# Altium PCB Hospital Negatoscope Touch PCB v2 .PcbDoc
Units mm, origin at the board's own origin, x right, y up, seen from the top; angles counter-clockwise.
Board outline 140.35 x 32.79 mm, 2 copper layers (Top Layer, Bottom Layer); 31 components, 41 nets, 93 pads, 20 vias.
Unrouted connection lines stored in the file: 104.
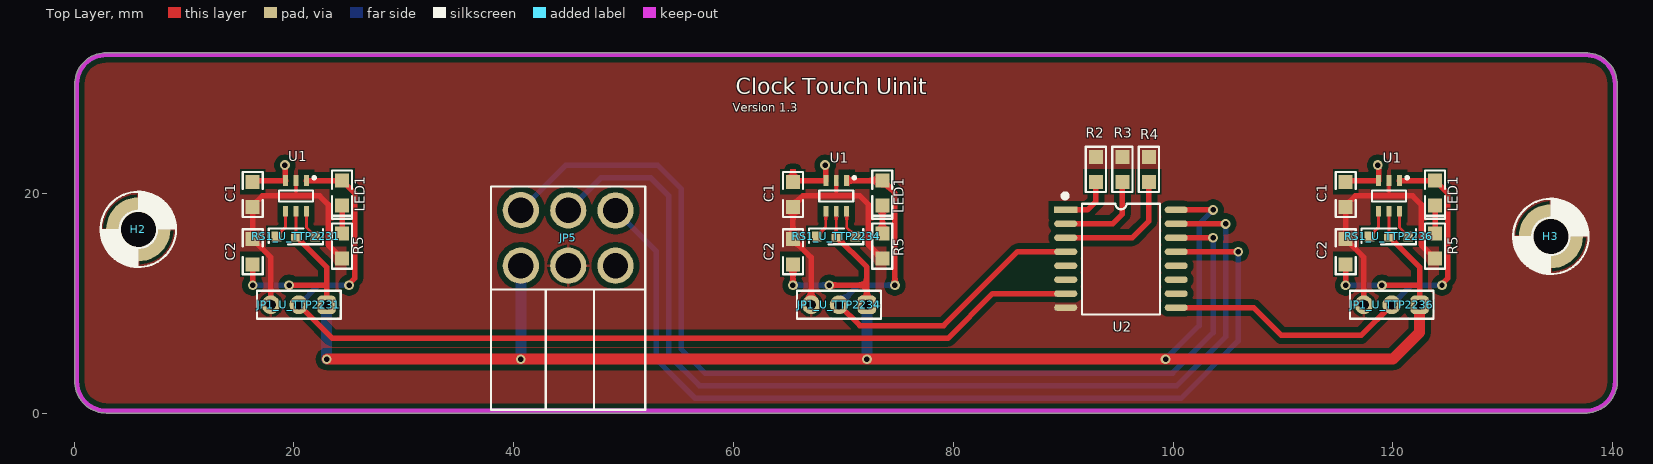
[diagram p0: Top Layer view]
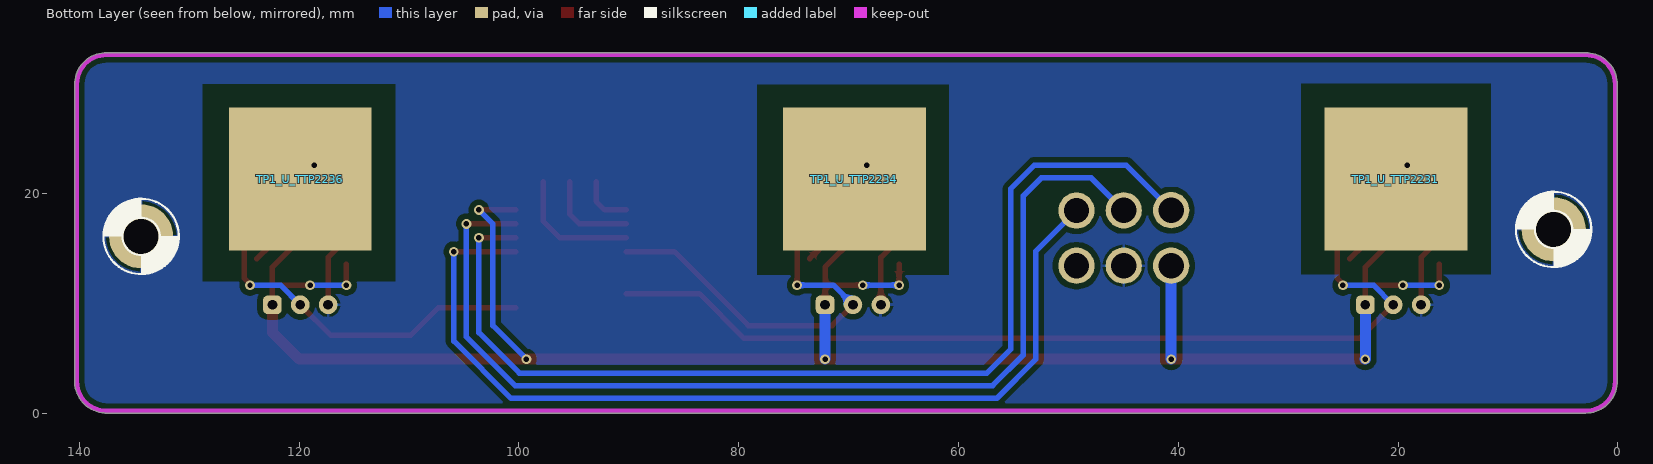
[diagram p1: Bottom Layer view, seen from below]

## Layer stack, top to bottom
Top Solder: solder mask 0.0102, Solder Resist, Dk 3.5
Top Layer: signal copper 0.0356
Dielectric 1: dielectric 0.32, FR-4, Dk 4.8
Bottom Layer: signal copper 0.0356
Bottom Solder: solder mask 0.0102, Solder Resist, Dk 3.5

## Board outline
0.054,2.794 0.054,30.099 0.059,30.144 cw(c2.921,29.972) 2.749,32.834 2.794,32.839 2.923,32.839 126.873,32.839 137.668,32.839 137.713,32.834 cw(c137.541,29.972) 140.403,30.144 140.408,30.099 140.408,2.667 140.388,2.579 cw(c137.541,2.921) 137.713,0.059 137.668,0.054 137.539,0.054 2.924,0.054 2.921,0.054 cw(c2.921,2.921)

## Design rules (kind name [scope] priority, off if disabled: settings)
Clearance Clearance_3 [InNamedPolygon('GND_L01_P004') Or InNamedPolygon('GND_L02_P005')] p1: gap=0.5 ignorepadtopadclearanceinfootprint=FALSE
Clearance Clearance_2 [InNamedPolygon('NONET_L01_P002') Or InNamedPolygon('NONET_L02_P003')] p2: gap=0.5 ignorepadtopadclearanceinfootprint=FALSE
Clearance Clearance_1 [InNamedPolygon('GND_L01_P000') Or InNamedPolygon('NONET_L01_P001')] p3: gap=0.5 ignorepadtopadclearanceinfootprint=FALSE
Clearance [All] p4: gap=0.254 ignorepadtopadclearanceinfootprint=FALSE
ComponentClearance [All] p1: gap=0 collisioncheckmode=3 verticalgap=0 showdistances=FALSE
HoleSize [All] p1: absolutevalues=TRUE maxlimit=5 minlimit=0.025 maxpercent=80.000 minpercent=20.000
PolygonConnect PolygonConnect_3 [All vs IsNamedPolygon('GND_L01_P004') Or IsNamedPolygon('GND_L02_P005')] p1: thpad.connectstyle=Relief thpad.reliefconductorwidth=0.254 thpad.reliefentries=4 thpad.polygonreliefangle="90 Angle" thpad.airgapwidth=0.254 smdpad.connectstyle=Direct smdpad.reliefconductorwidth=0.254 smdpad.reliefentries=4 smdpad.polygonreliefangle="90 Angle" smdpad.airgapwidth=0.254 via.connectstyle=Direct via.reliefconductorwidth=0.254 via.reliefentries=4 via.polygonreliefangle="90 Angle" via.airgapwidth=0.254
PolygonConnect PolygonConnect_2 [All vs IsNamedPolygon('NONET_L01_P002') Or IsNamedPolygon('NONET_L02_P003')] p2: thpad.connectstyle=Relief thpad.reliefconductorwidth=0.254 thpad.reliefentries=4 thpad.polygonreliefangle="90 Angle" thpad.airgapwidth=0.254 smdpad.connectstyle=Relief smdpad.reliefconductorwidth=0.254 smdpad.reliefentries=4 smdpad.polygonreliefangle="90 Angle" smdpad.airgapwidth=0.254 via.connectstyle=Direct via.reliefconductorwidth=0.254 via.reliefentries=4 via.polygonreliefangle="90 Angle" via.airgapwidth=0.254
PolygonConnect PolygonConnect_1 [All vs IsNamedPolygon('GND_L01_P000') Or IsNamedPolygon('NONET_L01_P001')] p3: connectstyle=Direct reliefconductorwidth=0.254 reliefentries=4 polygonreliefangle="90 Angle" airgapwidth=0.254
PolygonConnect [All] p4: connectstyle=Relief reliefconductorwidth=0.254 reliefentries=4 polygonreliefangle="90 Angle" airgapwidth=0.254
RoomDefinition U_TTP2234 [InComponentClass('U_TTP2234')] p1 off: confinementstyle=ConfineIn formatcopy=TRUE lockcomponents=FALSE outline 63.881,12.446 75.184,12.446 75.184,27.559 63.881,27.559
RoutingVias [All] p1: holewidth=0.5 width=0.9 viastyle="Through Hole" minholewidth=0.5 minwidth=0.9 maxholewidth=0.5 maxwidth=0.9
SolderMaskExpansion [All] p1: expansion=0.102 istentingtop=FALSE
Width [All] p1: maxlimit=1 minlimit=0.254 preferedwidth=0.5
28 further rules are at their usual default settings.

## Classes and differential pairs
channel class TTP223: U_TTP2231 U_TTP2232 U_TTP2233 U_TTP2234 U_TTP2235 U_TTP2236
component class U_TTP2236: C1 C2 JP1_U_TTP2236 LED1 R5 RS1_U_TTP2236 TP1_U_TTP2236 U1
component class U_TTP2234: C1 C2 JP1_U_TTP2234 LED1 R5 RS1_U_TTP2234 TP1_U_TTP2234 U1
component class U_TTP2231: C1 C2 JP1_U_TTP2231 LED1 R5 RS1_U_TTP2231 TP1_U_TTP2231 U1
component class U_PCF8574: R2 R3 R4 U2
component class Main: H2 H3

## Components (designator, comment, footprint, x,y, rotation, side; value= is the part's Value field where it differs from the comment)
C1 "100nF" "C 0805" 115.697,19.939 r270 top
C1 "100nF" "C 0805" 65.405,19.939 r270 top
C1 "100nF" "C 0805" 16.25,19.939 r270 top
C2 "30pF" "C 0805" 115.697,14.732 r90 top
C2 "30pF" "C 0805" 65.405,14.732 r90 top
C2 "30pF" "C 0805" 16.25,14.732 r90 top
H2 "Round Pad" P3.2C 5.842,16.764 r0 top
H3 "Round Pad" P3.2C 134.366,16.127 r0 top
JP1_U_TTP2231 "HDR-1X3" HDR-1X3_M 22.981,9.906 r180 top (schematic designator JP1)
JP1_U_TTP2234 "HDR-1X3" HDR-1X3_M 72.136,9.906 r180 top (schematic designator JP1)
JP1_U_TTP2236 "HDR-1X3" HDR-1X3_M 122.428,9.906 r180 top (schematic designator JP1)
JP5 "Header3X2" ATX-3*2-Right 37.943,0.267 r0 top
LED1 "LED-SMD" "LED 0805G" 123.825,20.066 r270 top
LED1 "LED-SMD" "LED 0805G" 73.533,20.066 r270 top
LED1 "LED-SMD" "LED 0805G" 24.378,20.066 r270 top
R2 "10K" "R 0805" 92.964,22.225 r270 top
R3 "10K" "R 0805" 95.377,22.225 r270 top
R4 "10K" "R 0805" 97.79,22.225 r270 top
R5 "Value" "R 0805" 123.825,15.24 r270 top (schematic designator R?)
R5 "Value" "R 0805" 73.533,15.24 r270 top (schematic designator R?)
R5 "Value" "R 0805" 24.378,15.24 r270 top (schematic designator R?)
RS1_U_TTP2231 "Resistor Selector" "RS 0603" 21.05,16.129 r180 top (schematic designator RS1)
RS1_U_TTP2234 "Resistor Selector" "RS 0603" 70.206,16.129 r180 top (schematic designator RS1)
RS1_U_TTP2236 "Resistor Selector" "RS 0603" 120.498,16.129 r180 top (schematic designator RS1)
TP1_U_TTP2231 "TouchKey" "Square TouchKey (1.5cm)" 20.193,21.336 r90 top (schematic designator TP1)
TP1_U_TTP2234 "TouchKey" "Square TouchKey (1.5cm)" 69.469,21.336 r90 top (schematic designator TP1)
TP1_U_TTP2236 "TouchKey" "Square TouchKey (1.5cm)" 119.888,21.336 r90 top (schematic designator TP1)
U1 "TTP223" SOT23-6L 119.634,19.812 r180 top
U1 "TTP223" SOT23-6L 69.342,19.812 r180 top
U1 "TTP223" SOT23-6L 20.187,19.812 r180 top
U2 "PCF8574" SOP16W_M 95.25,14.097 r0 top

## Footprints (in the part's own frame and the unit in brackets; to place one, negate y for a bottom-side part, rotate by r counter-clockwise, add the part's x,y. Pads: shape width x height; smd on the part's side, far side on the other; paste and mask are expansions set on the pad)
ATX-3*2-Right [mm]
  round 3.3 hole 2.3: 1(2.705,18.245) 2(7.015,18.23) 3(11.315,18.215) 4(2.705,13.195) 5(7.015,13.195) 6(11.315,13.195)
  silkscreen extent -0.01,0.08 14.03,20.41
"C 0805" [mil] "ï¿½Þ¼ï¿½ï¿½ï¿½ï¿½ï¿½Æ¬ï¿½ï¿½ï¿½ï¿½"
  rect 50x50 smd: 1(-45,0) 2(45,0)
  silkscreen extent -81,-36 81,36, body extent -39,-24 39,24, height 20
HDR-1X3_M [mm] "ï¿½ï¿½Ä¸ï¿½ï¿½3ï¿½ï¿½"
  rrect50% 1.7x1.7 hole 0.9: 1(0,0)
  round 1.7 hole 0.9: 2(2.54,0) 3(5.08,0)
  silkscreen extent -1.27,-1.27 6.35,1.27, body extent -1.27,-1.27 6.35,1.27, height 8.5
"LED 0805G" [mil] "ï¿½ï¿½É«0805LED"
  rect 50x50 smd: 1(-45,0) 2(45,0)
  silkscreen extent -81,-36 92,36, body extent -39,-25 39,25, height 32
P3.2C [mil] "MOUNTING PAD 3.2 mm, round, 5.8 mm Diameter"
  round 230 hole 125.98: P(0,0)
  silkscreen extent -135,-135 135,135
"R 0805" [mm] "1/8Wï¿½ï¿½Æ¬ï¿½ï¿½ï¿½ï¿½"
  rect 1.27x1.27 smd: 1(-1.143,0) 2(1.143,0)
  silkscreen extent -2.05,-0.91 2.05,0.91, body extent -1,-0.62 1,0.63, height 0.5
"RS 0603" [mil]
  rect 35x35 smd: 1(-35,0) 2(104,0) 3(34,0)
  silkscreen extent -63,-28 132,28, body extent -31,-16 32,16, height 16
SOP16W_M [mm] "10.3*10.3*2.6mm£¨³¤¿í¸ß£©"
  rect 2.1x0.6 smd: 1(-5.025,4.445)
  oval 2.1x0.6 smd: 2(-5.025,3.175) 3(-5.025,1.905) 4(-5.025,0.635) 5(-5.025,-0.635) 6(-5.025,-1.905) 7(-5.025,-3.175) 8(-5.025,-4.445) 9(5.025,-4.445) 10(5.025,-3.175) 11(5.025,-1.905) 12(5.025,-0.635) 13(5.025,0.635) 14(5.025,1.905) 15(5.025,3.175) 16(5.025,4.445)
  silkscreen extent -5.23,-5.08 3.56,5.87, body extent -5.15,-5.15 5.15,5.15, height 2.7
SOT23-6L [mm] "3x1.6x1.1mm(ï¿½ï¿½ï¿½ï¿½ï¿½)"
  rect 0.45x1 smd: 1(-0.95,-1.397) 2(0,-1.397) 3(0.95,-1.397) 4(0.95,1.397) 5(0,1.397) 6(-0.95,1.397)
  silkscreen extent -1.78,-1.78 1.55,0.51, body extent -1.5,-1.4 1.5,1.4, height 1.15
"Square TouchKey (1.5cm)" [mm]
  rect 13x13 smd far side: 1(0,0)

## Part data
C1 C1 C1 C2 C2 C2: library part C, "Non-polar patch capacitor", BOM名称=无极性贴片电容, 学习资源=www.ooocke.com, 版权归属=源创客
H2 H3: library part MOUNT-PAD-ROUND, "MOUNTING PAD, round"
JP1_U_TTP2231 JP1_U_TTP2234 JP1_U_TTP2236: library part "Header 3", "3P Connector", BOM名称=3P接插件, 学习资源=www.ooocke.com, 版权归属=源创客
JP5: library part "Header 3X2", "3*2P Connector", BOM名称=3*2P接插件, 学习资源=www.ooocke.com, 版权归属=源创客
LED1 LED1 LED1: "Patch LED", BOM名称=贴片LED, 学习资源=www.ooocke.com, 版权归属=源创客
R2 R3 R4 R5 R5 R5: library part R, "Chip resistor", BOM名称="Chip resistor", 学习资源=www.ooocke.com, 版权归属=源创客
U2: "Remote 8-Bit I/O Expander for I  2C Bus"

## Via types
v1: diameter 0.9, hole 0.5, Top Layer to Bottom Layer, tented both sides, 20 vias

## Nets (pads, with @x,y where several pads share a name; then routed paths per layer and width w, separated by ;. In a path a pad name is that pad's centre, name@x,y a point inside that pad or via, vN(x,y) a via of type N, cw(c..) or ccw(c..) an arc to the next point about the centre after c; other vN are vias at no path point)
3.3V: C2.1 JP1_U_TTP2231.1 JP1_U_TTP2234.1 JP1_U_TTP2236.1 JP5.4 RS1_U_TTP2231.3 RS1_U_TTP2234.3 RS1_U_TTP2236.3 U1.5 U2.16 | length 195
  Top Layer w0.254: RS1_U_TTP2231.3 U1.5@20.187,18.415 ; RS1_U_TTP2234.3 U1.5@69.342,18.415 ; RS1_U_TTP2236.3 U1.5@119.634,18.415
  Top Layer w0.5: v1(16.25,11.684) C2.1@16.25,13.589 ; v1(19.552,11.684) 22.981,11.684 ; RS1_U_TTP2231.3 22.981,13.335 22.981,11.684 ; JP1_U_TTP2231.1 22.981,11.684 ; v1(65.405,11.684) C2.1@65.405,13.589 ; v1(68.707,11.684) 72.136,11.684 ; RS1_U_TTP2234.3 72.136,13.335 72.136,11.684 ; JP1_U_TTP2234.1 72.136,11.684 ; U2.16 v1(103.632,18.542) ; v1(115.697,11.684) C2.1@115.697,13.589 ; v1(118.999,11.684) 122.428,11.684 ; RS1_U_TTP2236.3 122.428,13.335 122.428,11.684 ; JP1_U_TTP2236.1 122.428,11.684
  Top Layer w1: v1(22.987,4.953) v1(40.64,4.953) v1(72.136,4.953) v1(99.314,4.953) 120.015,4.953 122.428,7.366 JP1_U_TTP2236.1
  Bottom Layer w0.5: v1(16.25,11.684) v1(19.552,11.684) ; v1(40.64,4.953) v1@40.644,4.957 ; JP5.4@40.644,13.458 JP5.4 ; v1(65.405,11.684) v1(68.707,11.684) ; v1(99.314,4.953) 102.362,8.001 102.362,17.272 v1(103.632,18.542) ; v1(115.697,11.684) v1(118.999,11.684)
  Bottom Layer w1: JP1_U_TTP2231.1 22.981,4.959 v1(22.987,4.953) ; v1@40.644,4.957 JP5.4@40.644,13.458 ; v1(72.136,4.953) JP1_U_TTP2234.1
AHLB_U_TTP2231: RS1_U_TTP2231.2 U1.4@19.237,18.415 | length 2.6
  Top Layer w0.254: RS1_U_TTP2231.2 19.237,16.957 U1.4@19.237,18.415
AHLB_U_TTP2232: 
AHLB_U_TTP2233: 
AHLB_U_TTP2234: RS1_U_TTP2234.2 U1.4@68.392,18.415 | length 2.6
  Top Layer w0.254: RS1_U_TTP2234.2 68.392,16.957 U1.4@68.392,18.415
AHLB_U_TTP2235: 
AHLB_U_TTP2236: RS1_U_TTP2236.2 U1.4@118.684,18.415 | length 2.6
  Top Layer w0.254: RS1_U_TTP2236.2 118.684,16.957 U1.4@118.684,18.415
GND: C1.2 C2.2 H2.P H3.P JP1_U_TTP2231.3 JP1_U_TTP2234.3 JP1_U_TTP2236.3 JP5.5 R2.1 R3.1 R4.1 R5.2 U1.2 U2.8 | length 72.4
  Top Layer w0.254: 20.187,19.812 U1.2@20.187,21.209 ; 69.342,19.812 U1.2@69.342,21.209 ; 119.634,19.812 U1.2@119.634,21.209
  Top Layer w0.5: JP1_U_TTP2231.3 17.901,14.224 16.25,15.875 16.25,18.923 17.139,19.812 20.187,19.812 22.346,19.812 23.108,19.05 23.108,15.367 R5.2@24.377,14.097 ; JP1_U_TTP2234.3 67.056,14.224 65.405,15.875 65.405,18.923 66.294,19.812 69.342,19.812 71.501,19.812 72.263,19.05 72.263,15.367 R5.2@73.533,14.097 ; JP1_U_TTP2236.3 117.348,14.224 115.697,15.875 115.697,18.923 116.586,19.812 119.634,19.812 121.793,19.812 122.555,19.05 122.555,15.367 R5.2@123.825,14.097
INPUT_U_TTP2231: C1.1@16.25,21.082 TP1_U_TTP2231.1 U1.3@19.237,21.209 | length 4.3
  Top Layer w0.254: C1.1@16.25,21.082 C1.1@16.25,21.209
  Top Layer w0.5: C1.1@16.25,21.209 U1.3@19.237,21.209 ; v1(19.177,22.606) 19.212,22.571 U1.3@19.212,21.459
INPUT_U_TTP2232: 
INPUT_U_TTP2233: 
INPUT_U_TTP2234: C1.1@65.405,21.082 TP1_U_TTP2234.1 U1.3@68.392,21.209 | length 4.5
  Top Layer w0.5: C1.1@65.405,21.082 65.532,21.209 68.392,21.209 68.392,22.54 v1(68.326,22.606)
INPUT_U_TTP2235: 
INPUT_U_TTP2236: C1.1@115.697,21.082 TP1_U_TTP2236.1 U1.3@118.684,21.209 | length 4.7
  Top Layer w0.254: C1.1@115.697,21.082 C1.1@115.697,21.209
  Top Layer w0.5: C1.1@115.697,21.209 118.684,21.209 118.684,22.667 v1@118.618,22.733
  other v1: 118.618,22.606
INT: JP5.3 U2.13 | length 85.4
  Top Layer w0.5: U2.13 v1(105.918,14.732)
  Bottom Layer w0.5: JP5.3 52.959,14.781 52.959,4.953 56.515,1.397 100.711,1.397 105.918,6.604 v1(105.918,14.732)
NetLED1_U_TTP2231_2: LED1.2@24.378,18.923 R5.1@24.377,16.383 | length 2.5
  Top Layer w0.5: R5.1@24.378,16.383 LED1.2@24.378,18.923
NetLED1_U_TTP2232_2: 
NetLED1_U_TTP2233_2: 
NetLED1_U_TTP2234_2: LED1.2@73.533,18.923 R5.1@73.533,16.383 | length 2.5
  Top Layer w0.5: R5.1@73.533,16.383 LED1.2@73.533,18.923
NetLED1_U_TTP2235_2: 
NetLED1_U_TTP2236_2: LED1.2@123.825,18.923 R5.1@123.825,16.383 | length 2.5
  Top Layer w0.5: R5.1@123.825,16.383 LED1.2@123.825,18.923
NetR2_2: R2.2 U2.1 | length 4.8
  Top Layer w0.5: U2.1 92.202,18.542 92.964,19.304 R2.2
NetR3_2: R3.2 U2.2 | length 8.4
  Top Layer w0.5: U2.2 94.488,17.272 95.377,18.161 R3.2
NetR4_2: R4.2 U2.3 | length 11.8
  Top Layer w0.5: U2.3 96.266,16.002 97.79,17.526 R4.2
NetU2_11: U2.11
NetU2_12: U2.12
OUTPUT_U_TTP2231: JP1_U_TTP2231.2 LED1.1@24.378,21.209 U1.1@21.137,21.209 U2.7 | length 91.5
  Top Layer w0.5: JP1_U_TTP2231.2 23.489,6.858 79.502,6.858 83.566,10.922 U2.7 ; U1.1@21.137,21.209 24.378,21.209 25.54,20.047 25.54,12.332 25.013,11.805 v1(25.013,11.684)
  Bottom Layer w0.5: JP1_U_TTP2231.2 22.219,11.684 v1(25.013,11.684)
OUTPUT_U_TTP2232: U2.6
OUTPUT_U_TTP2233: U2.5
OUTPUT_U_TTP2234: JP1_U_TTP2234.2 LED1.1@73.533,21.209 U1.1@70.292,21.209 U2.4 | length 43.3
  Top Layer w0.5: JP1_U_TTP2234.2 71.501,8.001 79.121,8.001 85.852,14.732 U2.4 ; U1.1@70.292,21.209 73.533,21.209 74.676,20.066 v1(74.676,11.684)
  Bottom Layer w0.5: JP1_U_TTP2234.2 71.374,11.684 v1(74.676,11.684)
OUTPUT_U_TTP2235: U2.10
OUTPUT_U_TTP2236: JP1_U_TTP2236.2 LED1.1@123.825,21.209 U1.1@120.584,21.209 U2.9 | length 40.6
  Top Layer w0.5: U2.9 107.315,9.652 109.855,7.112 117.094,7.112 JP1_U_TTP2236.2 ; U1.1@120.584,21.209 123.825,21.209 124.987,20.047 124.987,12.332 124.46,11.805 v1(124.46,11.684)
  Bottom Layer w0.5: JP1_U_TTP2236.2 121.666,11.684 v1(124.46,11.684)
SCL: JP5.1 U2.14 | length 94.6
  Top Layer w0.5: U2.14 v1(103.632,16.002)
  Bottom Layer w0.5: JP5.1 44.742,22.606 53.086,22.606 55.245,20.447 55.245,5.842 57.404,3.683 99.949,3.683 103.632,7.366 v1(103.632,16.002)
SDA: JP5.2 U2.15 | length 94
  Top Layer w0.5: U2.15 v1(104.775,17.272)
  Bottom Layer w0.5: JP5.2 47.924,21.463 52.451,21.463 54.102,19.812 54.102,5.334 56.896,2.54 100.33,2.54 104.775,6.985 v1(104.775,17.272)
SHIELD: 
TOG_U_TTP2231: RS1_U_TTP2231.1 U1.6@21.137,18.415 | length 2.6
  Top Layer w0.254: U1.6@21.137,18.415 21.137,16.932 RS1_U_TTP2231.1
TOG_U_TTP2232: 
TOG_U_TTP2233: 
TOG_U_TTP2234: RS1_U_TTP2234.1 U1.6@70.292,18.415 | length 2.6
  Top Layer w0.254: U1.6@70.292,18.415 70.292,16.932 RS1_U_TTP2234.1
TOG_U_TTP2235: 
TOG_U_TTP2236: RS1_U_TTP2236.1 U1.6@120.584,18.415 | length 2.6
  Top Layer w0.254: U1.6@120.584,18.415 120.584,16.932 RS1_U_TTP2236.1
pads on no net: JP5.6

## Polygon pours and split planes (outlines as drawn)
GND on Top Layer "GND_L01_P004" (solid, remove dead copper, pour order 4): 0.054,2.794 0.054,30.099 0.059,30.144 cw(c2.921,29.972) 2.749,32.834 2.794,32.839 2.923,32.839 126.873,32.839 137.668,32.839 137.713,32.834 cw(c137.541,29.972) 140.403,30.144 140.408,30.099 140.408,2.667 140.388,2.579 cw(c137.541,2.921) 137.713,0.059 137.668,0.054 137.539,0.054 2.924,0.054 2.921,0.054 cw(c2.921,2.921)
GND on Bottom Layer "GND_L02_P005" (solid, remove dead copper, pour order 5): 0.054,2.794 0.054,30.099 0.059,30.144 cw(c2.921,29.972) 2.749,32.834 2.794,32.839 2.923,32.839 126.873,32.839 137.668,32.839 137.713,32.834 cw(c137.541,29.972) 140.403,30.144 140.408,30.099 140.408,2.667 140.388,2.579 cw(c137.541,2.921) 137.713,0.059 137.668,0.054 137.539,0.054 2.924,0.054 2.921,0.054 cw(c2.921,2.921)

## Keep-outs
Keep-Out Layer:
  lines w0.4: 0.254,2.794 0.254,30.099 ; 0.254,2.921 ccw(c2.921,2.921) 2.921,0.254 137.668,0.254 ; 0.254,29.972 cw(c2.921,29.972) 2.921,32.639 ; 2.794,32.639 126.873,32.639 137.668,32.639 ; 137.541,0.254 ccw(c137.541,2.921) 140.208,2.921 ; 137.541,32.639 cw(c137.541,29.972) 140.208,29.972 ; 140.208,2.667 140.208,30.099

## Other copper
Bottom Layer:
  pour cut-out: 28.829,30.017 11.557,30.017 11.557,12.7 28.829,12.7
  pour cut-out: 78.359,29.971 60.833,29.971 60.833,12.573 78.359,12.573
  pour cut-out: 128.778,29.971 111.252,29.971 111.252,12.065 128.778,12.065

## Silkscreen, mask and mechanical layers (free items; w line width, h text height)
Top Overlay:
  text "Clock Touch Uinit" at 60.194,28.58 h2.5
  text "Version 1.3" at 59.94,27.19 h1.3
Mechanical 1:
  lines w0.254: 16.631,11.176 24.251,11.176 24.251,8.636 ; 65.786,11.557 73.406,11.557 73.406,9.017
Mechanical 15:
  region: 159.516,19.134 159.516,19.158 159.54,19.158 159.54,19.134
  region: 159.611,19.158 159.611,19.134 159.587,19.134 159.587,19.158
  region: 159.119,21.801 159.095,21.801 159.095,21.825 159.119,21.825